# Altium PCB Tutorial.PcbDoc
Units mil, origin at the board's own origin, x right, y up, seen from the top; angles counter-clockwise.
Board outline 6000 x 4000 mil, 2 copper layers (Top Layer, Bottom Layer); 8 components, 0 nets, 16 pads, 0 vias.
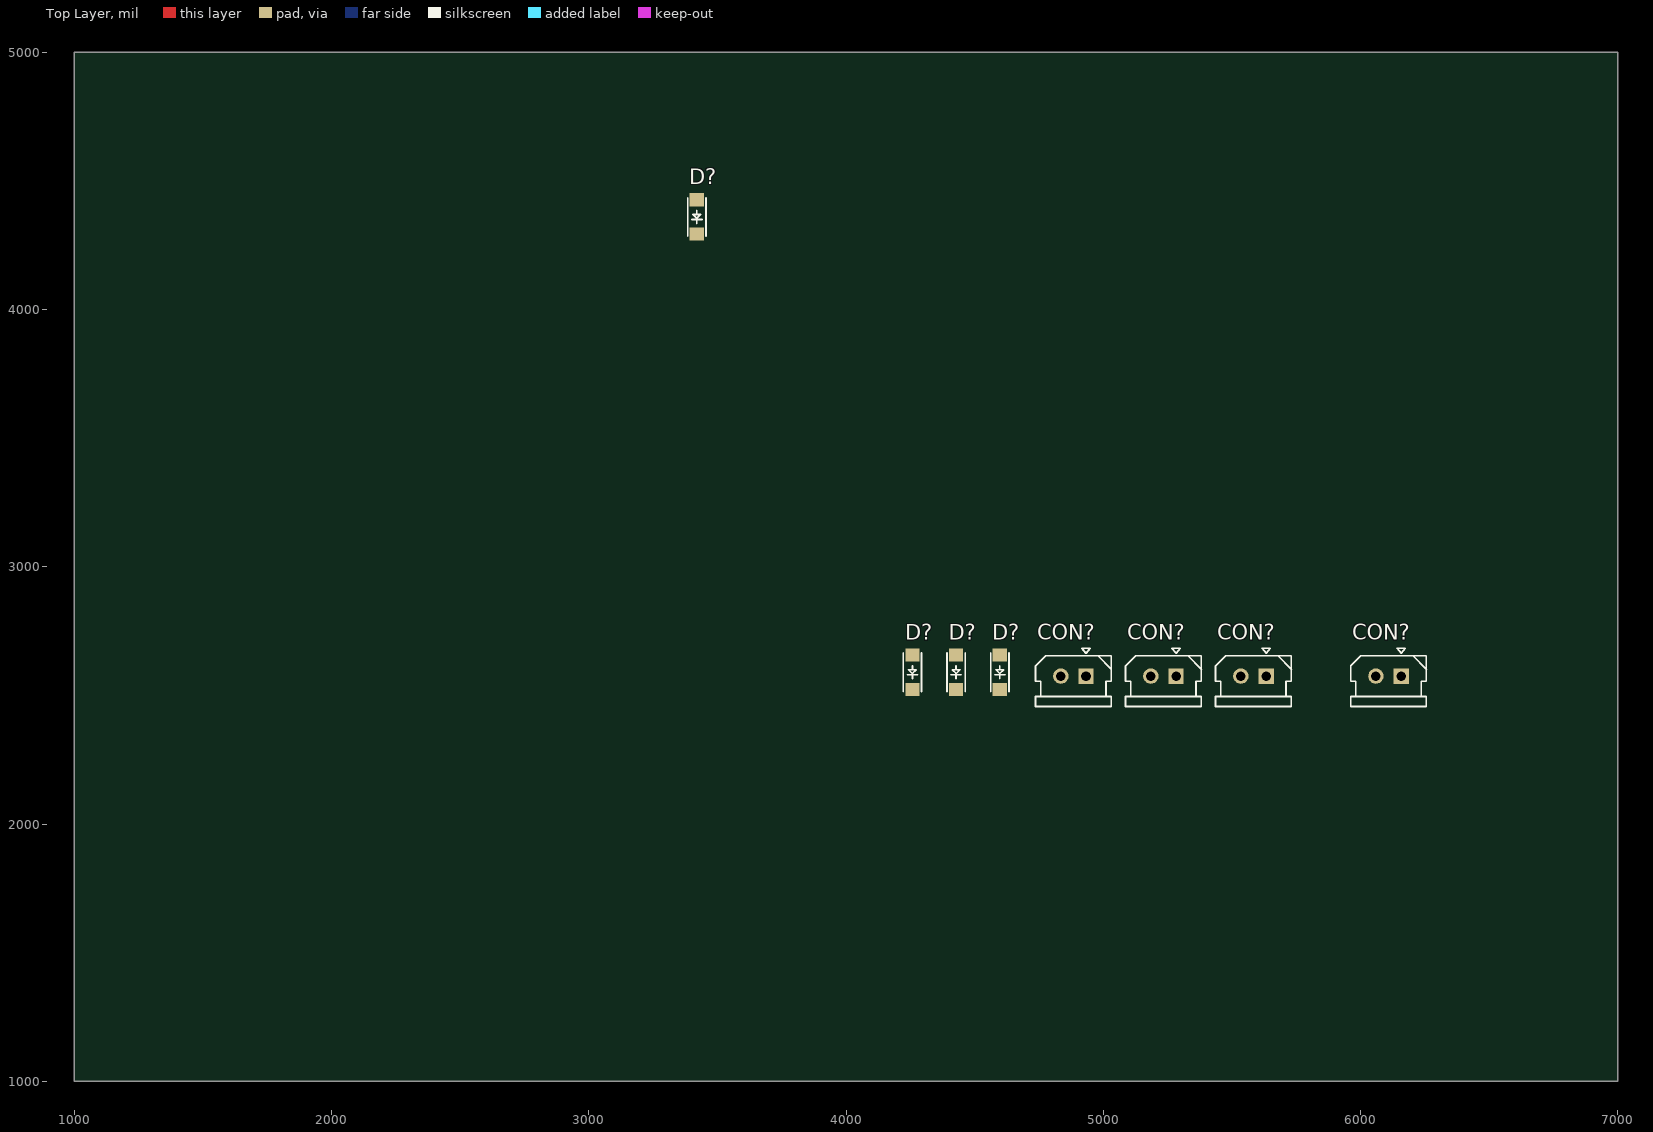
[diagram p0: Top Layer view]
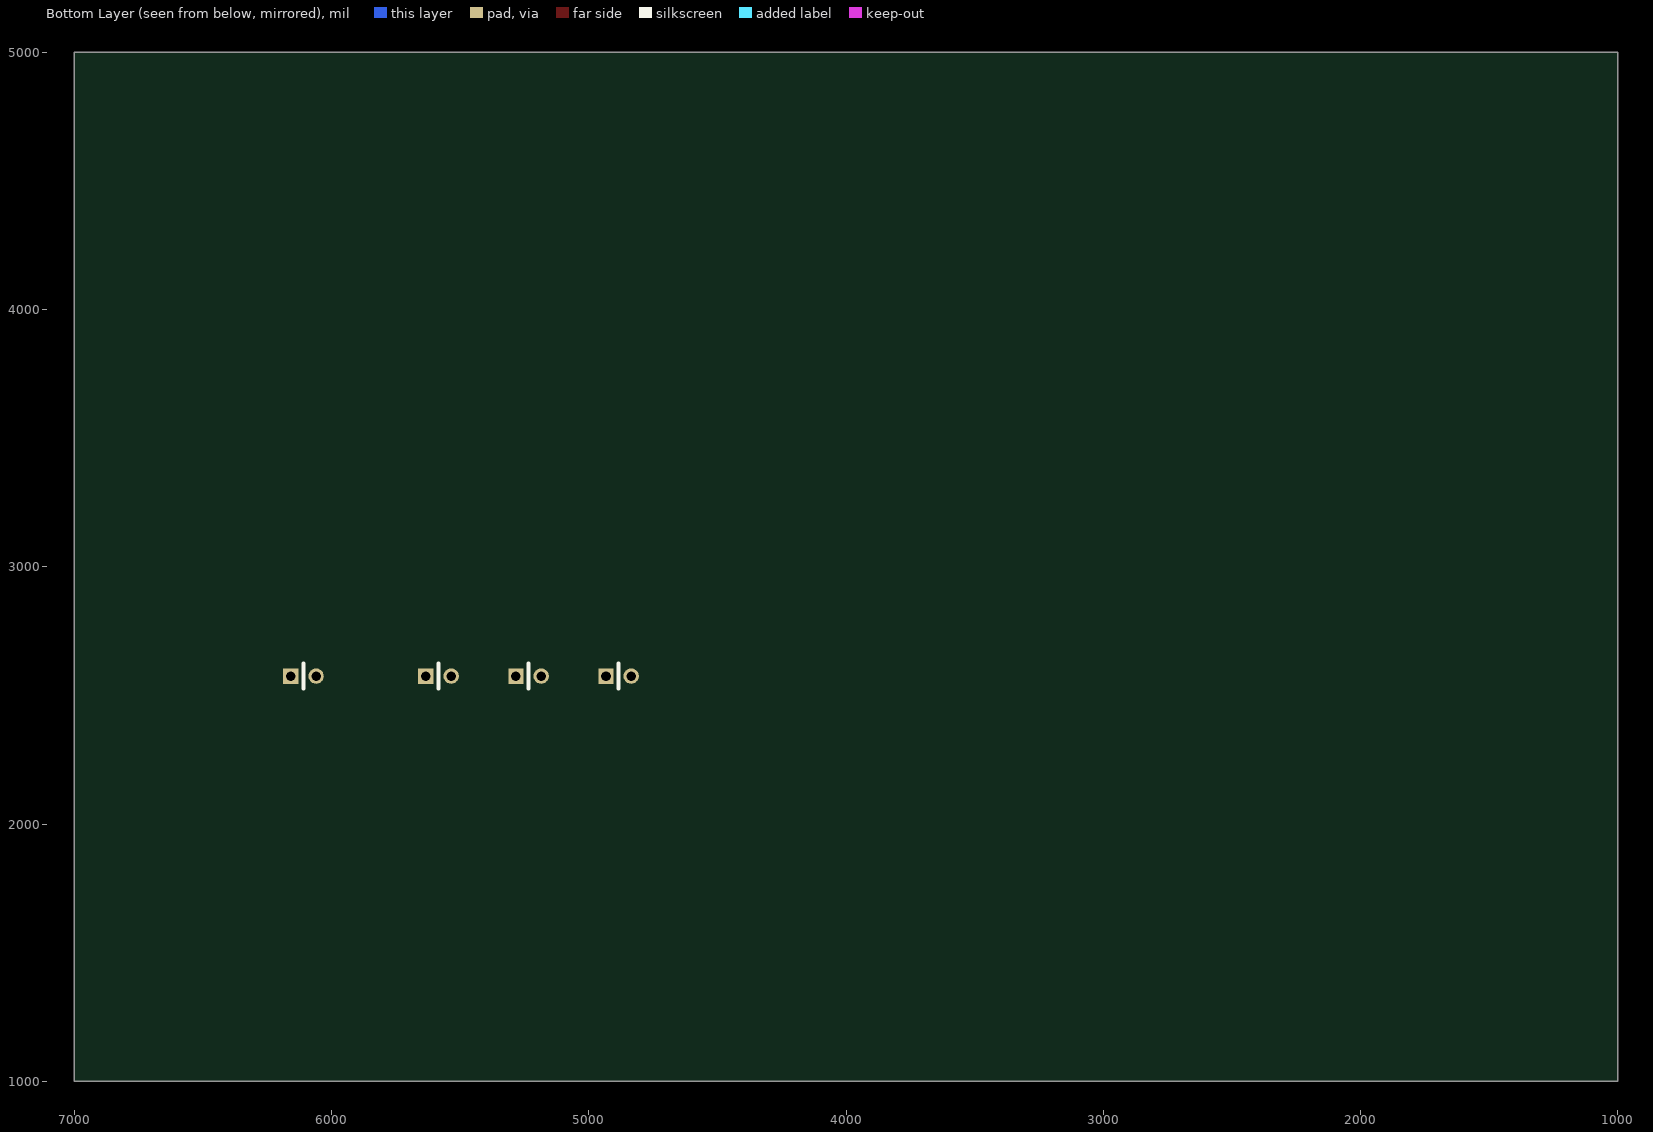
[diagram p1: Bottom Layer view, seen from below]

## Layer stack, top to bottom
Top Solder: solder mask 0.4, Solder Resist, Dk 3.5
Top Layer: signal copper 1.4
Dielectric 1: dielectric 12.6, FR-4, Dk 4.8
Bottom Layer: signal copper 1.4
Bottom Solder: solder mask 0.4, Solder Resist, Dk 3.5

## Board outline
1000,1000 7000,1000 7000,5000 1000,5000

## Design rules (kind name [scope] priority, off if disabled: settings)
Clearance [All] p1: gap=10 ignorepadtopadclearanceinfootprint=FALSE except(0: Arc-Hole Track-Hole SMDPad-Hole THPad-Hole Via-Hole Fill-Hole Poly-Hole Region-Hole Text-Hole)
PolygonConnect [All] p1: connectstyle=Relief reliefconductorwidth=10 reliefentries=4 polygonreliefangle="90 Angle" airgapwidth=10
RoutingVias [All] p1: holewidth=28 width=50 viastyle="Through Hole" minholewidth=28 minwidth=50 maxholewidth=28 maxwidth=50
SolderMaskExpansion [All] p1: expansion=4
Width [All] p1: maxlimit=10 minlimit=10 preferedwidth=10
30 further rules are at their usual default settings.

## Classes and differential pairs
component class Tutorial: CON? D?

## Components (designator, comment, footprint, x,y, rotation, side; value= is the part's Value field where it differs from the comment)
CON? "5267-02" CND-5267-02 6158,2575 r0 top
CON? "5267-02" CND-5267-02 4933,2575 r0 top
CON? "5267-02" CND-5267-02 5633,2575 r0 top
CON? "5267-02" CND-5267-02 5283,2575 r0 top
D? "1N4148W/SOD-123" DS-SOD-123 3420,4360 r90 top
D? "1N4148W/SOD-123" DS-SOD-123 4598,2590 r90 top
D? "1N4148W/SOD-123" DS-SOD-123 4258,2590 r90 top
D? "1N4148W/SOD-123" DS-SOD-123 4428,2590 r90 top

## Footprints (in the part's own frame and the unit in brackets; to place one, negate y for a bottom-side part, rotate by r counter-clockwise, add the part's x,y. Pads: shape width x height; smd on the part's side, far side on the other; paste and mask are expansions set on the pad)
CND-5267-02 [mil] "Molex 2.5mm"
  rect 60x60 / inner round 60 / far side rect 60x60 hole 37: 1(0,0)
  round 60 hole 37: 2(-98,0)
  silkscreen extent -196,-118 98,108, body extent -197,-121 94,72, height 234
DS-SOD-123 [mm] "SOD-123"
  rect 1.3x1.4 smd: 1(1.7,0) 2(-1.7,0)
  silkscreen extent -1.89,-0.9 1.89,0.9

## Part data
CON? CON? CON? CON?: "CND-Molex-2.5mm"
D? D? D? D?: library part 1N4148W, "DS-SDO-123"

## Nets (pads, with @x,y where several pads share a name; then routed paths per layer and width w, separated by ;. In a path a pad name is that pad's centre, name@x,y a point inside that pad or via, vN(x,y) a via of type N, cw(c..) or ccw(c..) an arc to the next point about the centre after c; other vN are vias at no path point)
pads on no net: CON?.1 CON?.2 D?.1 D?.2